# Altium PCB Bluetooth_NRF.PcbDoc
Units mm, origin at the board's own origin, x right, y up, seen from the top; angles counter-clockwise.
Board outline 55.88 x 83.72 mm, 2 copper layers (Component Side, Bottom Layer), stack 0.325 mm thick; 63 components, 139 nets, 448 pads, 16 vias.
Unrouted connection lines stored in the file: 111.
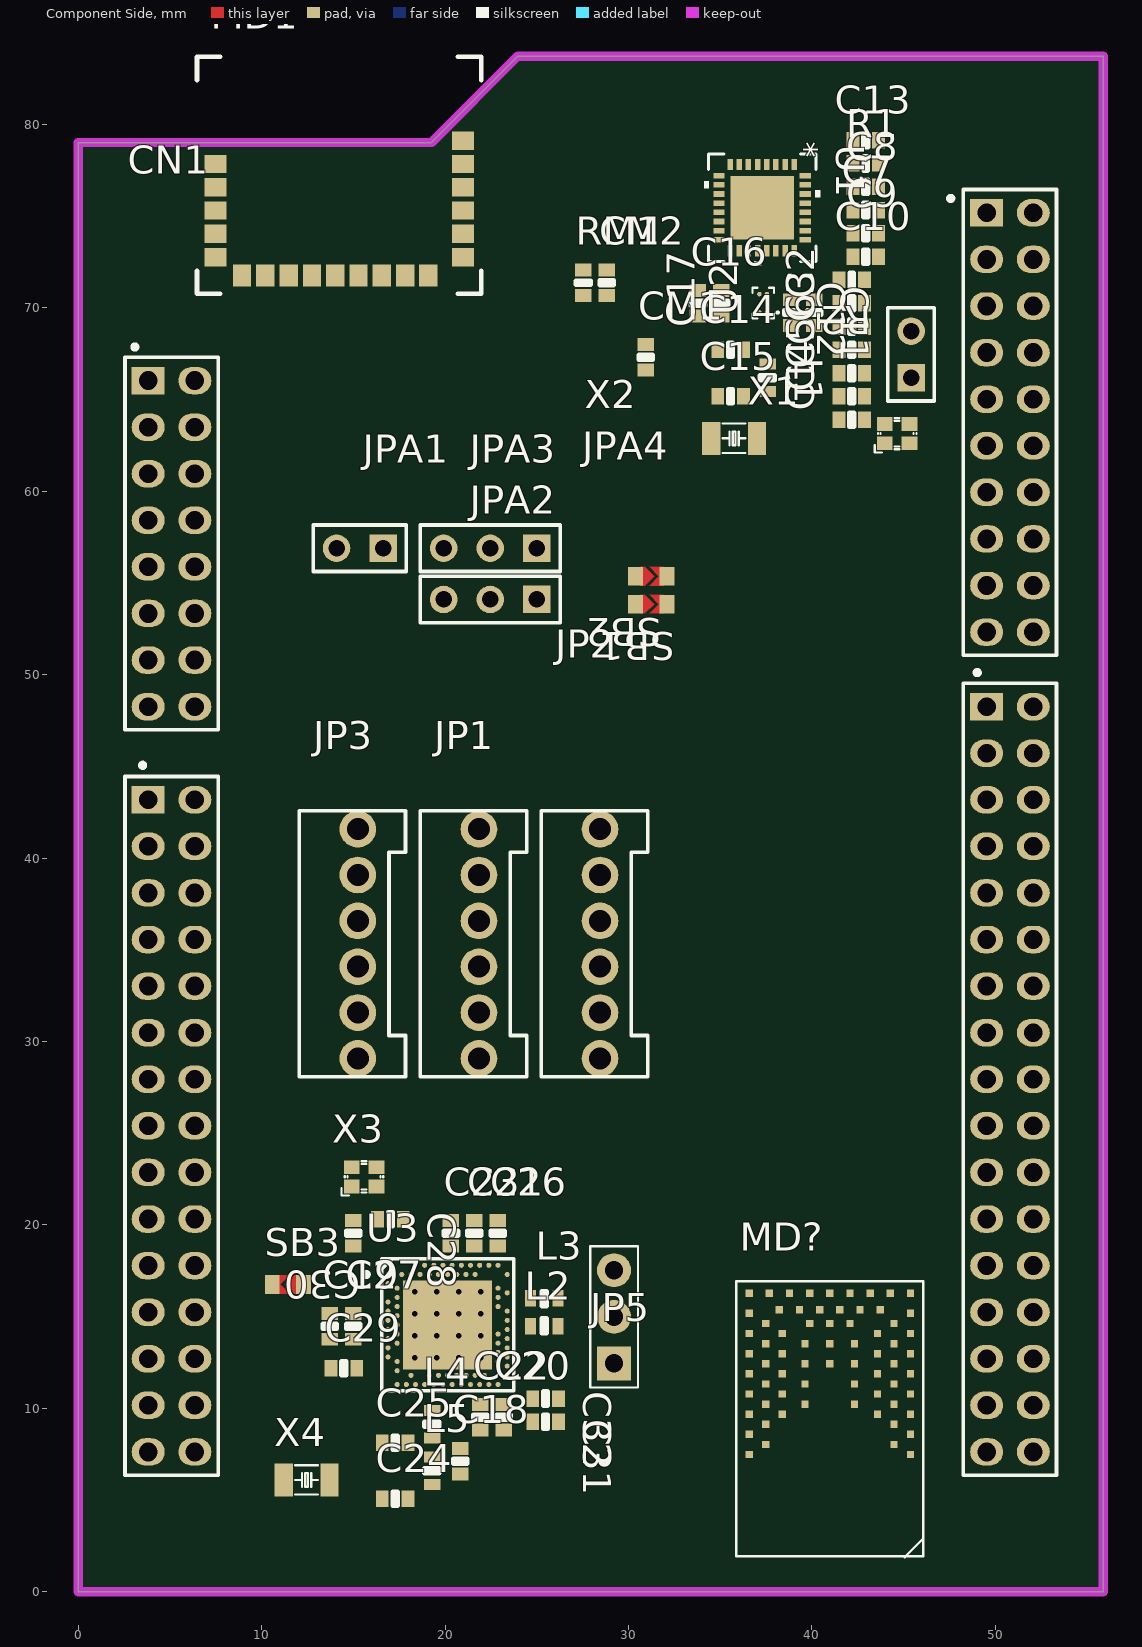
[diagram p0: Component Side view]
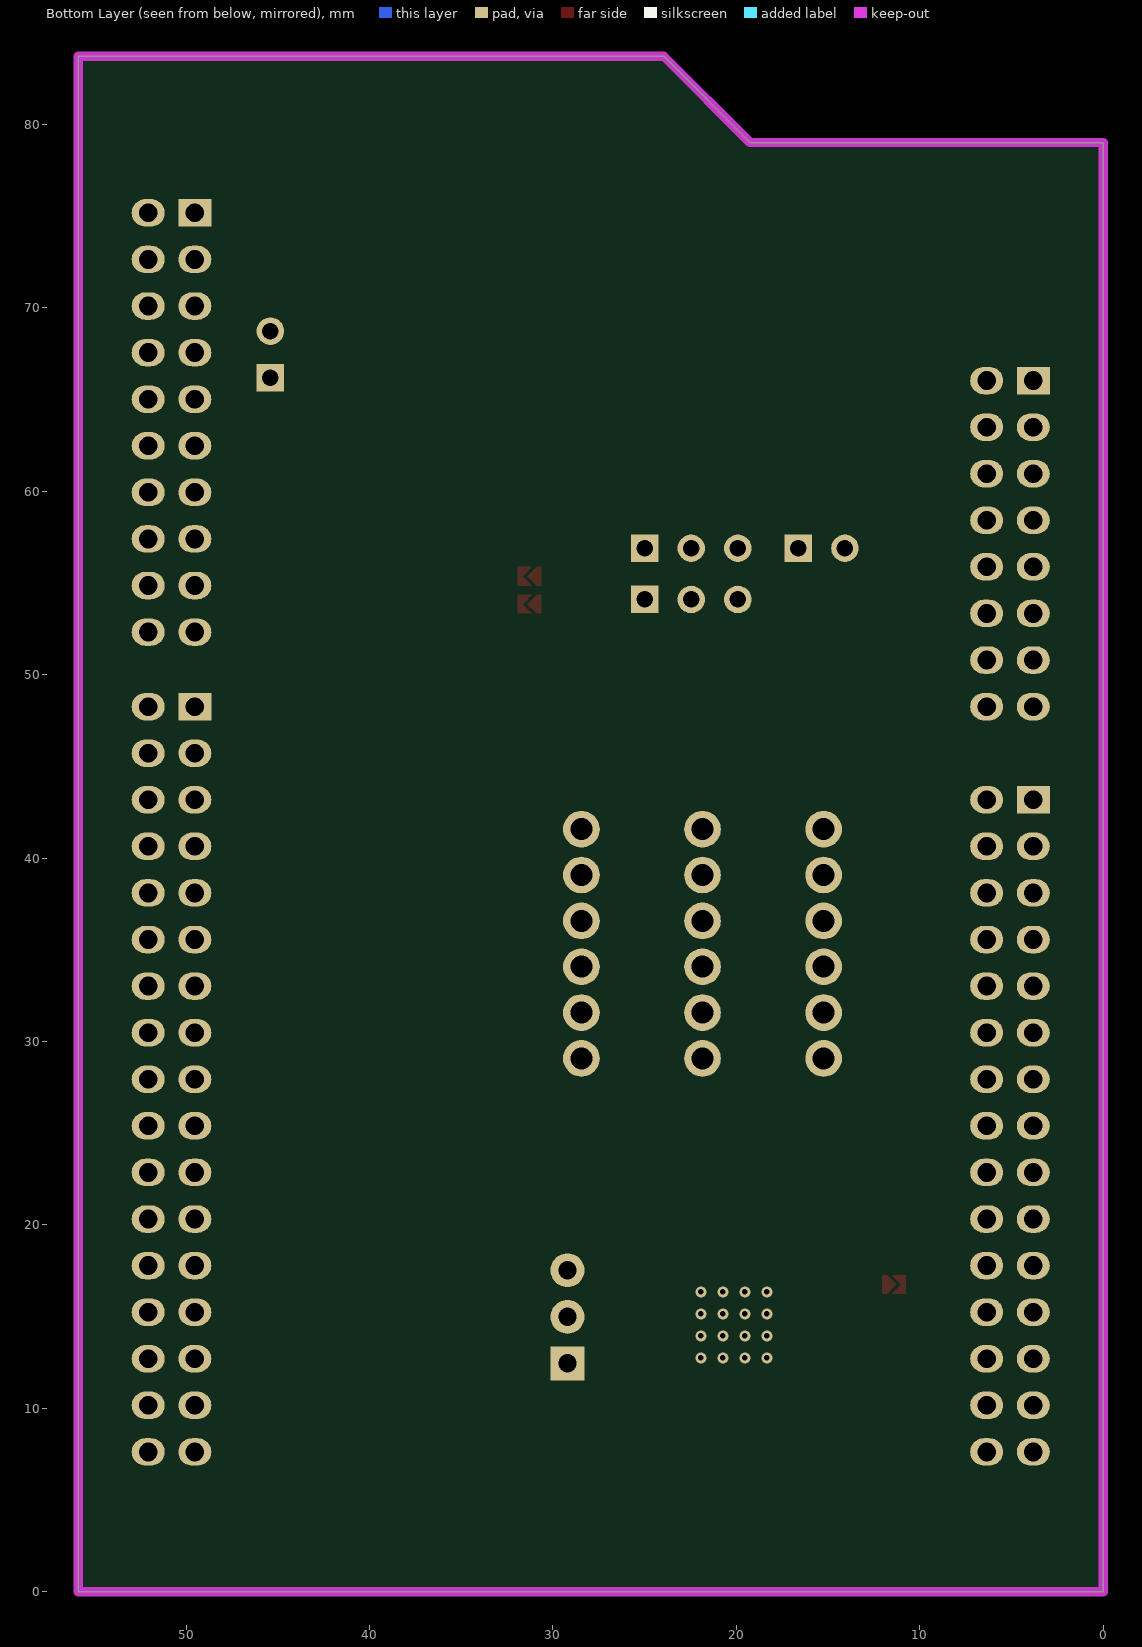
[diagram p1: Bottom Layer view, seen from below]

## Layer stack, top to bottom
Top Solder: solder mask 0.0102, Solder Resist, Dk 3.5
Component Side: signal copper 0.0356
Dielectric 1: core 0.254, FR-4, Dk 4.2
Bottom Layer: signal copper 0.0356
Solder Side: solder mask 0.0102, Solder Resist, Dk 3.5

## Board outline
0,0 55.88,0 55.88,83.718 23.952,83.718 19.253,79.019 0,79.019

## Design rules (kind name [scope] priority, off if disabled: settings)
Clearance [All] p1: gap=0.152 ignorepadtopadclearanceinfootprint=FALSE except(0: Arc-Hole Track-Hole SMDPad-Hole THPad-Hole Via-Hole Fill-Hole Poly-Hole Region-Hole Text-Hole)
ComponentClearance [Not IsNetTieComponent vs Not IsNetTieComponent] p1 off: gap=0.254 collisioncheckmode=3 verticalgap=0.254 showdistances=FALSE
Height [All] p1 off: minheight=0 maxheight=25.4 prefheight=12.7
HoleSize [All] p1: absolutevalues=TRUE maxlimit=12.7 minlimit=0.025 maxpercent=80.000 minpercent=20.000
MinimumSolderMaskSliver [All] p1: minsoldermaskwidth=0.076
PlaneClearance [All] p1: clearance=0.203
PlaneConnect [All] p1: planeconnectstyle=Direct reliefexpansion=0.508 reliefentries=4 reliefconductorwidth=0.254 reliefairgap=0.254
PolygonConnect PolygonConnectLED [HasFootprint('XZMDKCBDDG45S-9')] p1: connectstyle=Direct reliefconductorwidth=0.254 reliefentries=4 polygonreliefangle="90 Angle" airgapwidth=0.254
PolygonConnect PolygonConnectPower [IsNamedPolygon('Power')] p2: connectstyle=Direct reliefconductorwidth=0.254 reliefentries=4 polygonreliefangle="90 Angle" airgapwidth=0.254
PolygonConnect PolygonConnectVDD [All vs InNet('VDD')] p3: connectstyle=Direct reliefconductorwidth=0.254 reliefentries=4 polygonreliefangle="90 Angle" airgapwidth=0.254
PolygonConnect PolygonConnectVia [All vs IsVia] p4: connectstyle=Direct reliefconductorwidth=0.254 reliefentries=4 polygonreliefangle="90 Angle" airgapwidth=0.254
PolygonConnect [All] p5: connectstyle=Relief reliefconductorwidth=0.508 reliefentries=4 polygonreliefangle="90 Angle" airgapwidth=0.254
RoomDefinition U_BM833 [InComponentClass('U_BM833')] p1: confinementstyle=ConfineIn formatcopy=TRUE lockcomponents=FALSE outline 57.023,1.397 71.857,1.397 71.857,19.736 57.023,19.736
RoomDefinition U_NRF52833 [InComponentClass('U_NRF52833')] p2: confinementstyle=ConfineIn formatcopy=TRUE lockcomponents=FALSE outline 9.931,27.674 9.931,3.302 34.29,3.302 34.29,27.674
RoomDefinition U_BLUENRG-M2SP [InComponentClass('U_BLUENRG-M2SP')] p3: confinementstyle=ConfineIn formatcopy=TRUE lockcomponents=FALSE outline 4.724,45.466 33.89,45.466 33.89,99.822 4.724,99.822
RoomDefinition U_BLUENRG-232 [InComponentClass('U_BLUENRG-232')] p4: confinementstyle=ConfineIn formatcopy=TRUE lockcomponents=FALSE outline 31.807,82.194 31.807,60.604 46.793,60.604 46.793,82.194
RoomDefinition Bluetooth [InComponentClass('Bluetooth')] p5 off: confinementstyle=ConfineIn formatcopy=TRUE lockcomponents=FALSE outline 60.96,1.975 80.01,1.975 80.01,18.542 60.96,18.542
RoutingVias [All] p1: holewidth=0.254 width=0.508 viastyle="Through Hole" minholewidth=0.254 minwidth=0.508 maxholewidth=0.711 maxwidth=1.27
SilkToSilkClearance [All] p1: silktosilkclearance=0
SolderMaskExpansion SolderMaskExpansionVia [IsVia] p1: expansion=0.025 istentingtop=FALSE soldermaskfromhole=TRUE
SolderMaskExpansion [All] p2: expansion=0.076 istentingtop=FALSE
Width [All] p1: maxlimit=12.7 minlimit=0.102 preferedwidth=0.152 minimp=50.000000 maximp=50.000000 favimp=50.000000
23 further rules are at their usual default settings.

## Classes and differential pairs
net class P1.[0..9]: P1.0 P1.1 P1.2 P1.3 P1.4 P1.5 P1.6 P1.7 P1.8 P1.9
net class P0.[0..31]: P0.0 P0.1 P0.2 P0.3 P0.4 P0.5 P0.6 P0.7 P0.8 P0.9 P0.10 P0.11 P0.12 P0.13 P0.14 P0.15 P0.16 P0.17 P0.18 P0.19 P0.20 P0.21 P0.22 P0.23 P0.24 P0.25 P0.26 P0.27 P0.28 P0.29 P0.30 P0.31
component class U_BM833: MD?
net class SP[0..16]: SP0 SP1 SP2 SP3 SP4 SP5 SP6 SP7 SP8 SP9 SP10 SP11 SP12 SP13 SP14 SP15 SP16
net class NRF[2..21]: NRF2 NRF3 NRF4 NRF5 NRF6 NRF7 NRF8 NRF9 NRF10 NRF13 NRF14 NRF15 NRF16 NRF17 NRF18 NRF19 NRF20 NRF21
net class BNG[0..15]: BNG0 BNG1 BNG2 BNG3 BNG4 BNG5 BNG6 BNG7 BNG8 BNG9 BNG10 BNG11 BNG12 BNG13 BNG14 BNG15
component class U_NRF52833: C18 C18_U_NRF52833 C19 C19_U_NRF52833 C20 C20_U_NRF52833 C21 C21_U_NRF52833 C22 C22_U_NRF52833 C23 C23_U_NRF52833 C24 C24_U_NRF52833 C25 C25_U_NRF52833 C26 C26_U_NRF52833 C27 C27_U_NRF52833 C28 C28_U_NRF52833 C29 C29_U_NRF52833 C30 C30_U_NRF52833 C31 C31_U_NRF52833 C32 C32_U_NRF52833 JP5 JP5_U_NRF52833 L2 L2_U_NRF52833 L3 L3_U_NRF52833 L4 L4_U_NRF52833 L5 L5_U_NRF52833 SB3 SB3_U_NRF52833 U3 U3_U_NRF52833 X3 X3_U_NRF52833 X4 X4_U_NRF52833
component class U_BLUENRG-M2SP: CM1 CM2 JPA1 JPA2 JPA3 MD1 RM1 SB1 SB2
component class U_BLUENRG-232: C1 C2 C3 C4 C5 C6 C7 C8 C9 C10 C11 C12 C13 C14 C15 C16 C17 JPA4 L1 R1 R2 U1 U2 X1 X2
component class Bluetooth: CN1 JP1 JP2 JP3

## Components (designator, comment, footprint, x,y, rotation, side; value= is the part's Value field where it differs from the comment)
C1 "1uF 6.3V 0603" C0603[1608X92] 42.17,63.906 r180 top value=1uF
C2 "0.1uF 6.3V 0603" C0603[1608X92] 42.17,70.256 r180 top value=0.1uF
C3 "1uF 6.3V 0603" C0603[1608X92] 42.17,68.986 r180 top value=1uF
C4 "0.1uF 6.3V 0603" C0603[1608X92] 42.17,65.176 r180 top value=0.1uF
C5 "1uF 6.3V 0603" C0603[1608X92] 42.17,66.446 r180 top value=1uF
C6 "0.1uF 6.3V 0603" C0603[1608X92] 42.17,67.716 r180 top value=0.1uF
C7 "0.12uF 10V 0603" C0603[1608X92] 42.932,75.336 r0 top value=0.12uF
C8 "100pF 10V 0603" C0603[1608X92] 42.932,76.606 r0 top value=100pF
C9 "1uF 6.3V 0603" C0603[1608X92] 42.932,74.066 r0 top value=1uF
C10 "0.1uF 6.3V 0603" C0603[1608X92] 42.932,72.796 r0 top value=0.1uF
C11 "18pF 50V 0603" C0603[1608X92] 40.138,69.748 r270 top value=18pF
C12 "18pF 50V 0603" C0603[1608X92] 38.868,69.748 r270 top value=18pF
C13 "0.1uF 16V 0603" C0603[1608X92] 42.932,79.146 r0 top value=0.1uF
C14 "CAPACITOR 0603" C0603[1608X92] 35.566,67.716 r0 top
C15 "CAPACITOR 0603" C0603[1608X92] 35.566,65.176 r0 top
C16 "15pF 50V 0603" C0603[1608X92] 33.788,70.256 r90 top value=15pF
C17 "15pF 50V 0603" C0603[1608X92] 35.058,70.256 r90 top value=15pF
C18 "1uF 6.3V 0603" C0603[1608X92] 20.828,7.112 r270 top value=1uF
C19 "1uF 6.3V 0603" C0603[1608X92] 13.716,14.466 r90 top value=1uF
C20 "15pF 50V 0603" C0603[1608X92] 23.19,9.513 r90 top value=15pF
C21 "18pF 50V 0603" C0603[1608X92] 21.59,19.546 r90 top value=18pF
C22 "15pF 50V 0603" C0603[1608X92] 21.92,9.513 r90 top value=15pF
C23 "18pF 50V 0603" C0603[1608X92] 20.32,19.546 r90 top value=18pF
C24 "CAPACITOR 0603" C0603[1608X92] 17.272,5.068 r0 top
C25 "CAPACITOR 0603" C0603[1608X92] 17.272,8.116 r0 top
C26 "0.1uF 16V 0603" C0603[1608X92] 22.86,19.546 r90 top value=0.1uF
C27 "4.7uF 16V 0603" C0603[1608X92] 14.986,14.466 r90 top value=4.7uF
C28 "4.7uF 16V 0603" C0603[1608X92] 17.018,20.308 r0 top value=4.7uF
C29 "CAPACITOR 0603" C0603[1608X92] 14.478,12.18 r0 top
C30 "4.7uF 16V 0603" C0603[1608X92] 14.986,19.546 r270 top value=4.7uF
C31 "0.1uF 16V 0603" C0603[1608X92] 25.476,9.259 r0 top value=0.1uF
C32 "0.1uF 16V 0603" C0603[1608X92] 25.476,10.529 r0 top value=0.1uF
CM1 "10uF 6.3V 0603" C0603[1608X92] 30.937,67.31 r270 top value=10uF
CM2 "0.1uF 16V 0603" C0603[1608X92] 28.81,71.374 r270 top value=0.1uF
CN1 "ST_Zio connector" ST_Zio 3.81,7.62 r0 top locked
JP1 "SWD" MOLEX_5045_6 21.844,35.326 r270 top
JP2 "SWD" MOLEX_5045_6 28.448,35.326 r270 top
JP3 "SWD" MOLEX_5045_6 15.24,35.326 r270 top
JP5 "Jumper_Header 3x1 Fitted 1-2" HDR1X3#1 29.21,12.446 r90 top value="Shunt Fitted 1-2"
JPA1 "Header 2" HDR1X2 16.618,56.896 r180 top
JPA2 "Header 3" HDR1X3#2 25,54.102 r180 top
JPA3 "Header 3" HDR1X3#2 25,56.896 r180 top
JPA4 "Header 2" HDR1X2 45.41,66.192 r90 top
L1 "INDUCTOR 0603" IND0603 37.598,66.192 r270 top
L2 "INDUCTOR 0603" IND0603 25.4,14.478 r180 top
L3 "INDUCTOR 0603" IND0603 25.4,16.002 r0 top
L4 "INDUCTOR 0603" IND0603 19.304,9.132 r270 top
L5 "INDUCTOR 0603" IND0603 19.304,6.592 r270 top
MD1 "BLUENRG-M2SP" BLUENRG-M2SP 14.218,76.581 r0 top
MD? "BM833" BM833 40.975,9.826 r180 top
R1 "10K 1% 0603" R0603[1608] 42.932,77.876 r0 top value=10K
R2 "10K 1% 0603" R0603[1608] 42.17,71.526 r180 top value=10K
RM1 "10K 1% 0603" R0603[1608] 27.54,71.374 r270 top value=10K
SB1 "Closed" SB_0603 31.242,53.848 r180 top
SB2 "Open" SB_0603 31.242,55.372 r180 top
SB3 "Closed" SB_0603 11.43,16.752 r0 top
U1 "BLUENRG-232" QFPN-32-5x5mm 37.287,75.463 r270 top
U2 "BALF-NRG-02D3" "CSPG-4 (0.4mm)" 37.344,70.256 r90 top
U3 "NRF52833" AQFN-73 20.135,14.546 r0 top
X1 "NX3215SA 32.768KHz" 2-SMD 35.758,62.89 r0 top value=32.768KHz
X2 "NX2016SA 32MHz" 4-SMD 44.648,63.144 r0 top value=32MHz
X3 "NX2016SA 32MHz" 4-SMD 15.581,22.623 r0 top value=32MHz
X4 "NX3215SA 32.768KHz" 2-SMD 12.446,6.096 r0 top value=32.768KHz

## Footprints (in the part's own frame and the unit in brackets; to place one, negate y for a bottom-side part, rotate by r counter-clockwise, add the part's x,y. Pads: shape width x height; smd on the part's side, far side on the other; paste and mask are expansions set on the pad)
2-SMD [mm]
  rect 1x1.8 smd mask+0.05: 1(1.25,0) 2(-1.25,0)
  silkscreen extent -0.63,-0.8 0.63,0.8, body extent -1.65,-0.8 1.65,0.8, height 0.9
4-SMD [mm]
  rect 0.85x0.75 smd mask+0.05: 1(-0.675,-0.525) 2(0.675,-0.525) 3(0.675,0.525) 4(-0.675,0.525)
  silkscreen extent -1.22,-1.02 1.05,0.85, body extent -1.05,-0.85 1.05,0.85, height 0.7
AQFN-73 [mm]
  rect 4.85x4.85 smd paste-5 mask+0.05: 74(0,0)
  round 0.275 smd paste+0.012 mask+0.05: A8(-1.25,3.25) A10(-0.75,3.25) A12(-0.25,3.25) A14(0.25,3.25) A16(0.75,3.25) A18(1.25,3.25) A20(1.75,3.25) A22(2.25,3.25) A23(2.75,3.25) AA24(3.25,-2.25) AB2(-2.75,-2.5) AC5(-2,-2.75) AC9(-1,-2.75) AC11(-0.5,-2.75) AC13(0,-2.75) AC15(0.5,-2.75) AC17(1,-2.75) AC19(1.5,-2.75) AC21(2,-2.75) AC24(3.25,-2.75) AD2(-2.75,-3.25) AD4(-2.25,-3.25) AD6(-1.75,-3.25) AD8(-1.25,-3.25) AD10(-0.75,-3.25) AD12(-0.25,-3.25) AD14(0.25,-3.25) AD16(0.75,-3.25) AD18(1.25,-3.25) AD20(1.75,-3.25) AD22(2.25,-3.25) AD23(2.75,-3.25) B1(-3.25,2.75) B3(-2.5,2.75) B5(-2,2.75) B7(-1.5,2.75) B9(-1,2.75) B11(-0.5,2.75) B13(0,2.75) B15(0.5,2.75) B17(1,2.75) B19(1.5,2.75) B24(3.25,2.75) C1(-3.25,2.25) D2(-2.75,2) D23(2.75,2) E24(3.25,1.75) F2(-2.75,1.5) F23(2.75,1.5) G1(-3.25,1.25) H2(-2.75,1) H23(2.75,1) J1(-3.25,0.75) J24(3.25,0.75) K2(-2.75,0.5) L1(-3.25,0.25) L24(3.25,0.25) M2(-2.75,0) N1(-3.25,-0.25) N24(3.25,-0.25) P2(-2.75,-0.5) P23(2.75,-0.5) R1(-3.25,-0.75) R24(3.25,-0.75) T2(-2.75,-1) T23(2.75,-1) U1(-3.25,-1.25) U24(3.25,-1.25) V23(2.75,-1.5) W1(-3.25,-1.75) W24(3.25,-1.75) Y2(-2.75,-2) Y23(2.75,-2)
  rrect50% 0.94x0.94 on Top Paste: ""(-1.71,-1.71) ""(-1.71,-0.57) ""(-1.71,0.57) ""(-1.71,1.71) ""(-0.57,-1.71) ""(-0.57,-0.57) ""(-0.57,0.57) ""(-0.57,1.71) ""(0.57,-1.71) ""(0.57,-0.57) ""(0.57,0.57) ""(0.57,1.71) ""(1.71,-1.71) ""(1.71,-0.57) ""(1.71,0.57) ""(1.71,1.71)
  silkscreen extent -4.56,-3.6 3.6,3.6, body extent -3.55,-3.55 3.55,3.55, height 0.85
BLUENRG-M2SP [mm]
  rect 1.2x1 smd: 1(-6.75,1.27) 2(-6.75,0) 3(-6.75,-1.27) 4(-6.75,-2.54) 5(-6.75,-3.81) 15(6.75,-3.81) 16(6.75,-2.54) 17(6.75,-1.27) 18(6.75,0) 19(6.75,1.27) 20(6.75,2.54)
  rect 1x1.2 smd: 6(-5.29,-4.81) 7(-4.02,-4.81) 8(-2.75,-4.81) 9(-1.48,-4.81) 10(-0.21,-4.81) 11(1.06,-4.81) 12(2.33,-4.81) 13(3.6,-4.81) 14(4.87,-4.81)
  Component Side region: -0.254,1.448
  silkscreen extent -7.75,-5.82 7.75,7.11
BM833 [mm]
  rect 0.4x0.4 smd: 1(-4.4,2.35) 2(-3.5,1.8) 3(-4.4,1.25) 4(-3.5,0.7) 5(-4.4,0.15) 6(-3.5,-0.4) 7(-4.4,-0.95) 8(-3.5,-1.5) 9(-4.4,-2.05) 10(-3.5,-2.6) 11(-4.4,-3.15) 12(-3.5,-3.7) 13(-4.4,-4.25) 14(-3.5,-4.8) 15(-4.4,-5.35) 16(-4.4,-6.45) 17(-3.3,-6.45) 18(-2.75,-5.55) 19(-2.2,-6.45) 20(-1.65,-5.55) 21(-1.1,-6.45) 22(-0.55,-5.55) 23(0,-6.45) 24(0.55,-5.55) 25(1.1,-6.45) 26(1.65,-5.55) 27(2.2,-6.45) 28(2.75,-5.55) 29(3.3,-6.45) 30(4.4,-6.45) 31(4.4,-5.35) 32(3.5,-4.8) 33(4.4,-4.25) 34(3.5,-3.7) 35(4.4,-3.15) 36(3.5,-2.6) 37(4.4,-2.05) 38(3.5,-1.5) 39(4.4,-0.95) 40(3.5,-0.4) 41(4.4,0.15) 42(3.5,0.7) 43(4.4,1.25) 44(3.5,1.8) 45(4.4,2.35) 46(1.35,-0.4) 47(-1.35,-0.4) 48(-2.6,0.15) 49(-2.6,-0.95) 50(-1.35,-1.5) 51(-2.6,-2.05) 52(-1.35,-2.6) 53(-2.6,-3.15) 54(-1.35,-3.7) 55(-2.6,-4.25) 56(-1.1,-4.8) 57(0,-4.8) 58(1.1,-4.8) 59(2.6,-4.25) 60(1.35,-3.7) 61(2.6,-3.15) 62(1.35,-2.6) 63(2.6,-2.05) 64(1.35,-1.5) 65(2.6,-0.95) 66(2.6,0.15) 67(0,-3.7) 68(0,-2.6)
  silkscreen extent -5.1,-7.1 5.1,7.94
C0603[1608X92] [mm] "Chip Capacitor, Body 1.6x0.8mm"
  rect 0.7x0.9 smd: 1(-0.7,0) 2(0.7,0)
  silkscreen extent -0.13,-0.38 0.13,0.38, body extent -0.8,-0.4 0.8,0.4, height 0.93
"CSPG-4 (0.4mm)" [mm]
  round 0.25 smd mask+0.05: A1(-0.5,-0.205) A2(-0.5,0.205) B1(0.5,-0.205) B2(0.5,0.205)
  silkscreen extent -0.84,-0.81 0.83,0.59, body extent -0.7,-0.45 0.7,0.45, height 0.25
HDR1X2 [mm] "Connector; Header; 2 Position"
  rect 1.5x1.5 hole 0.9: 1(0,0)
  round 1.5 hole 0.9: 2(2.54,0)
  silkscreen extent -1.27,-1.27 3.81,1.27
HDR1X3#1 [mm]
  rect 1.85x1.85 / inner round 1.85 / far side rect 1.85x1.85 hole 1 mask+0.05: 1(0,0)
  round 1.85 hole 1 mask+0.05: 2(2.54,0) 3(5.08,0)
  silkscreen extent -1.31,-1.3 6.39,1.3, body extent -1.37,-1.37 6.45,1.37, height 8.38
HDR1X3#2 [mm] "Connector; Header; 3 Position"
  rect 1.5x1.5 hole 0.9: 1(0,0)
  round 1.5 hole 0.9: 2(2.54,0) 3(5.08,0)
  silkscreen extent -1.27,-1.27 6.35,1.27
IND0603 [mm] "Chip Inductor, Body 1.55x0.85mm"
  rect 0.6x0.9 smd: 1(-0.75,0) 2(0.75,0)
  silkscreen extent -0.13,-0.43 0.13,0.38, body extent -0.85,-0.48 0.75,0.48, height 0.81
MOLEX_5045_6 [mm]
  round 2 hole 1.2: 1(-6.25,0) 2(-3.75,0) 3(-1.25,0) 4(1.25,0) 5(3.75,0) 6(6.25,0)
  silkscreen extent -7.25,-3.2 7.25,2.6, body extent -7.25,-3.15 7.25,2.65, height 11.7
QFPN-32-5x5mm [mil]
  rect 24x12 smd paste-6: 1(-92.52,68.91) 2(-92.52,49.23) 3(-92.52,29.53) 4(-92.52,9.85) 5(-92.52,-9.85) 6(-92.52,-29.53) 7(-92.52,-49.23) 8(-92.52,-68.91) 17(92.52,-68.91) 18(92.52,-49.23) 19(92.52,-29.53) 20(92.52,-9.85) 21(92.52,9.85) 22(92.52,29.53) 23(92.52,49.23) 24(92.52,68.91)
  rect 12x24 smd paste-6: 9(-68.92,-92.52) 10(-49.23,-92.52) 11(-29.53,-92.52) 12(-9.84,-92.52) 13(9.84,-92.52) 14(29.53,-92.52) 15(49.23,-92.52) 16(68.92,-92.52) 25(68.92,92.52) 26(49.23,92.52) 27(29.53,92.52) 28(9.84,92.52) 29(-9.84,92.52) 30(-29.53,92.52) 31(-49.23,92.52) 32(-68.92,92.52)
  rect 136x136 smd paste-68: 33(0,0)
  silkscreen extent -116,-125 125,125, body extent -103,-103 103,103, height 25
R0603[1608] [mm] "Chip Resistor, Body 1.55x0.85mm"
  rect 0.7x0.9 smd: 1(-0.7,0) 2(0.7,0)
  silkscreen extent -0.1,-0.4 0.1,0.4, body extent -0.77,-0.42 0.78,0.43, height 0.45
SB_0603 [mil] "Jumper"
  rect 32x40 smd: 1(33.75,0) 2(-33.75,0)
  Component Side region: -26.25,0 -16.25,0 3.75,-20 -26.25,-20
  Component Side region: -26.25,0 -16.25,0 3.75,20 -26.25,20
  Component Side region: 23.75,20 13.75,20 -6.25,0 13.75,-20 23.75,-20
ST_Zio [mm]
  rect 1.8x1.5 hole 1.02: 1(0,58.42) 17(0,35.56) 47(45.72,67.564) 67(45.72,40.64)
  oval 1.8x1.5 hole 1.02: 2(2.54,58.42) 3(0,55.88) 4(2.54,55.88) 5(0,53.34) 6(2.54,53.34) 7(0,50.8) 8(2.54,50.8) 9(0,48.26) 10(2.54,48.26) 11(0,45.72) 12(2.54,45.72) 13(0,43.18) 14(2.54,43.18) 15(0,40.64) 16(2.54,40.64) 18(2.54,35.56) 19(0,33.02) 20(2.54,33.02) 21(0,30.48) 22(2.54,30.48) 23(0,27.94) 24(2.54,27.94) 25(0,25.4) 26(2.54,25.4) 27(0,22.86) 28(2.54,22.86) 29(0,20.32) 30(2.54,20.32) 31(0,17.78) 32(2.54,17.78) 33(0,15.24) 34(2.54,15.24) 35(0,12.7) 36(2.54,12.7) 37(0,10.16) 38(2.54,10.16) 39(0,7.62) 40(2.54,7.62) 41(0,5.08) 42(2.54,5.08) 43(0,2.54) 44(2.54,2.54) 45(0,0) 46(2.54,0) 48(48.26,67.564) 49(45.72,65.024) 50(48.26,65.024) 51(45.72,62.484) 52(48.26,62.484) 53(45.72,59.944) 54(48.26,59.944) 55(45.72,57.404) 56(48.26,57.404) 57(45.72,54.864) 58(48.26,54.864) 59(45.72,52.324) 60(48.26,52.324) 61(45.72,49.784) 62(48.26,49.784) 63(45.72,47.244) 64(48.26,47.244) 65(45.72,44.704) 66(48.26,44.704) 68(48.26,40.64) 69(45.72,38.1) 70(48.26,38.1) 71(45.72,35.56) 72(48.26,35.56) 73(45.72,33.02) 74(48.26,33.02) 75(45.72,30.48) 76(48.26,30.48) 77(45.72,27.94) 78(48.26,27.94) 79(45.72,25.4) 80(48.26,25.4) 81(45.72,22.86) 82(48.26,22.86) 83(45.72,20.32) 84(48.26,20.32) 85(45.72,17.78) 86(48.26,17.78) 87(45.72,15.24) 88(48.26,15.24) 89(45.72,12.7) 90(48.26,12.7) 91(45.72,10.16) 92(48.26,10.16) 93(45.72,7.62) 94(48.26,7.62) 95(45.72,5.08) 96(48.26,5.08) 97(45.72,2.54) 98(48.26,2.54) 99(45.72,0) 100(48.26,0)
  silkscreen extent -1.27,-1.27 49.53,68.83, body extent -1.27,-1.27 49.53,68.83, height 8.64

## Part data
C1 C3 C5 C9 C18 C19: library part CAP_1uF_6.3V_0603_10%, "1uF 6.3V 10% 0603 (1608 Metric)", Manufacturer=Murata, PartNumber=GRM188R60J105KA01D, TemperatureCoefficient=X5R, Tolerance=10%, Voltage=6.3V, Mounting Technology="Surface Mount", PackageDescription="0603 (1608 Metric)", PackageReference=0603
C2 C4 C6 C10: library part CAP_0.1uF_6.3V_0603_10%, "0.1uF 6.3V 10% 0603 (1608 Metric)", Manufacturer=Murata, PartNumber=GRM188R70J104KA01D, Tolerance=10%, Voltage=6.3V, Mounting Technology="Surface Mount", PackageDescription="0603 (1608 Metric)", PackageReference=0603
C7: library part CAP_0.12uF_10V_0603_10%, "0.12uF 10V 10% 0603 (1608 Metric)", Manufacturer=Murata, PartNumber=GRM188R71A124KA01D, TemperatureCoefficient=X7R, Tolerance=10%, Voltage=10V, Mounting Technology="Surface Mount", PackageDescription="0603 (1608 Metric)", PackageReference=0603
C8: library part CAP_100pF_10V_0603_10%, "100pF 10V 10% 0603 (1608 Metric)", Manufacturer=Wurth, PartNumber=885012206003, TemperatureCoefficient=X7R, Tolerance=10%, Voltage=10V, Mounting Technology="Surface Mount", PackageDescription="0603 (1608 Metric)", PackageReference=0603
C11 C12 C21 C23: library part CAP_18pF_50V_0603_1%, "18pF 50V 1% 0603 (1608 Metric)", Manufacturer="AVX Corporation", PartNumber=06035A180FAT2A, TemperatureCoefficient=C0G, Tolerance=1%, Voltage=50V, Mounting Technology="Surface Mount", PackageDescription="0603 (1608 Metric)", PackageReference=0603
C13 C26 C31 C32 CM2: library part CAP_0.1uF_16V_0603_10%, "0.1uF 16V 10% 0603 (1608 Metric)", Manufacturer=Murata, PartNumber=GCM188R71C104KA37D, TemperatureCoefficient=X7R, Tolerance=10%, Voltage=16V, Mounting Technology="Surface Mount", PackageDescription="0603 (1608 Metric)", PackageReference=0603
C14 C15 C24 C25 C29: library part "CAP 0603", "Empty CAPACITOR 0603 (1608 Metric)", Mounting Technology="Surface Mount", PackageDescription="0603 (1608 Metric)", PackageReference=0603
C16 C17 C20 C22: library part CAP_15pF_50V_0603_1%, "15pF 50V 1% 0603 (1608 Metric)", Manufacturer="AVX Corporation", PartNumber=06035A150FAT2A, TemperatureCoefficient=C0G, Tolerance=1%, Voltage=50V, Mounting Technology="Surface Mount", PackageDescription="0603 (1608 Metric)", PackageReference=0603
C27 C28 C30: library part CAP_4.7uF_16V_0603_10%, "4.7uF 16V 10% 0603 (1608 Metric)", Manufacturer=Murata, PartNumber=GRM188R61A475KE15D, TemperatureCoefficient=X5R, Tolerance=10%, Voltage=16V, Mounting Technology="Surface Mount", PackageDescription="0603 (1608 Metric)", PackageReference=0603
CM1: library part CAP_10uF_6.3V_0603_10%, "10uF 6.3V 10% 0603 (1608 Metric)", Manufacturer=Murata, PartNumber=GRM188R60J106KE47D, TemperatureCoefficient=X5R, Tolerance=10%, Voltage=6.3V, Mounting Technology="Surface Mount", PackageDescription="0603 (1608 Metric)", PackageReference=0603
JP1 JP2 JP3: library part MOLEX_5045_6, Manufacturer="JST Sales America Inc.", PartNumber=B6B-PH-K-S(LF)(SN), Mounting Technology="Through Hole", PackageReference=JST-PH
JP5: "Header, 3x1, 2,54mm, VR, TH, Height 5.84mm/2.54mm - Shunt Fitted 1-2 by default", Manufacturer=SAMTEC, Manufacturer_Part_Number=TSW-103-07-F-S, ComponentLink1Description=Datasheet, ComponentLink1URL=http://tunmcdsvn.tun.st.com/Component_Datasheet_Library/Trunk/Connectors/Samtec_TSW-HTSW-series, ECCN_EU=n/a, ECCN_US=n/a, Internal_Part_Number=MCD-00684, Part_Type=Connector, Provided_By=SUBCO, Status=Released
JPA1 JPA4: "Header, 2-Pin", LatestRevisionDate=17-Jul-2002, LatestRevisionNote="Re-released for DXP Platform.", Publisher="Altium Limited"
JPA2 JPA3: "Header, 3-Pin", LatestRevisionDate=17-Jul-2002, LatestRevisionNote="Re-released for DXP Platform.", Publisher="Altium Limited"
L1 L2 L3 L4 L5: library part "IND 0603", "Empty INDUCTOR 0603", Mounting Technology="Surface Mount", PackageDescription="0603 (1608 metric)", PackageReference=0603
MD1 U1: Manufacturer=STMicroelectronics
  MD1: PartNumber=BLUENRG-M2SP
  U1: Mounting Technology="Surface Mount", PackageReference=QFN-32, Part Number=BLUENRG-232
MD?: "ultra low power Bluetooth Low Energy (BLE) modules using Nordic nRF52 SoC.  PCB trace Antenna", Manufacturer=Fanstel, PartNumber=BM833
R1 R2 RM1: library part RES_10K_0603_1%, "10K 0.25W 1% 0603 (1005 Metric)", Manufacturer="Vishay / Dale", PartNumber=CRCW060310K0FKEAHP, Power=0.25W, Tolerance=1%, ComponentLink1Description=Datasheet, ComponentLink1URL=http://www.vishay.com/docs/20065/rcse3.pdf, Mounting Technology="Surface Mount", PackageDescription="0603 (1608 Metric)", PackageReference=0603
SB1 SB3: library part "Circuit Breaker_close", "Circuit Breaker", Published=24-Mar-1999, Publisher="Altium Limited", Revision="July-2002: Re-released for DXP Platform."
SB2: library part "Circuit Breaker", "Circuit Breaker", Published=24-Mar-1999, Publisher="Altium Limited", Revision="July-2002: Re-released for DXP Platform."
U2: "50 ohm nominal input / conjugate match to BlueNRG tranceiver", Manufacturer=STMicroelectronics, Mounting Technology="Surface Mount", PackageReference=CSPG-4, PartNumber=BALF-NRG-02D3
U3: "Multi-protocol Bluetooth Low Energy, IEEE 802.15.4, ANT and 2.4GHz proprietary system-on-chip", Manufacturer="Nordic Semiconductor", PartNumber=nRF52833-QIAA, Mounting Technology="Surface Mount", PackageReference=AQFN-73
X1 X4: "Crystal 32.768kHz, 6pF, +-20ppm, 50Kohms max, SMD", Manufacturer=NDK, PartNumber=NX3215SA-32.768KHz-EXS00A-MU00525, Mounting Technology="Surface Mount", PackageReference=2-SMD, Type=Crystal_Osc
X2 X3: "Crystal 32MHz, 6pF, +-10ppm, 60ohms max, SMD", Manufacturer=NDK, PartNumber=NX2016SA-32MHZ-EXS00A-CS07977, Mounting Technology="Surface Mount", PackageReference=4-SMD, Type=Crystal_Osc

## Via types
v1: diameter 0.61, hole 0.305, Component Side to Bottom Layer, 16 vias

## Nets (pads, with @x,y where several pads share a name; then routed paths per layer and width w, separated by ;. In a path a pad name is that pad's centre, name@x,y a point inside that pad or via, vN(x,y) a via of type N, cw(c..) or ccw(c..) an arc to the next point about the centre after c; other vN are vias at no path point)
5V: CN1.9
AVDD: CN1.52 CN1.67
BNG0: CN1.56 CN1.84 U1.12
BNG1: CN1.86 U1.11
BNG2: CN1.58 CN1.90 U1.10
BNG3: CN1.60 CN1.92 U1.9
BNG4: CN1.94 U1.8
BNG5: CN1.96 U1.7
BNG6: CN1.98 U1.5
BNG7: CN1.100 U1.4
BNG8: CN1.99 U1.3
BNG9: CN1.97 JP2.2 U1.2
BNG10: CN1.95 JP2.4 U1.1
BNG11: CN1.91 U1.32
BNG12: CN1.89 U1.30
BNG13: CN1.87 U1.29
BNG14: CN1.85 U1.15
BNG15: CN1.81 U1.16
DEC: C18.2 JP5.2
GND: C1.1 C2.1 C3.1 C4.1 C5.1 C6.1 C7.2 C8.2 C9.2 C10.2 C11.2 C12.2 C13.2 C14.1 C15.1 C16.1 C17.1 C18.1 C19.1 C20.1 C21.2 C22.1 C23.2 C24.1 C25.1 C26.2 C27.1 C28.1 C29.1 C30.1 C31.2 C32.2 CM1.2 CM2.2 CN1.11 CN1.13 CN1.28 CN1.39 CN1.54 CN1.71 CN1.83 CN1.88 CN1.93 JP1.3 JP2.3 JP3.3 MD1.8 MD?.1 MD?.2 MD?.3 MD?.4 MD?.5 MD?.13 MD?.15 MD?.18 MD?.19 MD?.30 MD?.44 R1.2 U1.33 U2.A2 U3.74 U3.B7 X2.2 X2.4 X3.2 X3.4
  other v1: 18.335,12.746 19.535,12.746 20.735,12.746 21.935,12.746 18.335,13.946 19.535,13.946 20.735,13.946 21.935,13.946 18.335,15.146 19.535,15.146 20.735,15.146 21.935,15.146 18.335,16.346 19.535,16.346 20.735,16.346 21.935,16.346
I2C.SCL: CN1.48
I2C.SDA: CN1.50
IOREF: CN1.3
NetC7_1: C7.1 C8.1 U1.28
NetC9_1: C9.1 C10.1 U1.27
NetC11_1: C11.1 U1.23 X1.1
NetC12_1: C12.1 U1.22 X1.2
NetC14_2: C14.2 L1.1 U2.A1
NetC15_2: C15.2 L1.2
NetC16_2: C16.2 U1.17 X2.3
NetC17_2: C17.2 U1.18 X2.1
NetC20_2: C20.2 U3.A23 X3.1
NetC22_2: C22.2 U3.B24 X3.3
NetC24_2: C24.2 L4.1 U3.H23
NetC25_2: C25.2 L4.2 L5.1
NetCM2_1: CM2.1 JP1.5 RM1.1
NetJP2_5: JP2.5
NetJP3_2: JP3.2 U3.AA24
NetJP3_4: JP3.4 U3.AC24
NetJP5_1: JP5.1 L2.2
NetJP5_3: JP5.3 L3.1 U3.B3
NetL2_1: L2.1 L3.2
NetR1_1: R1.1 U1.31
NetSB3_1: SB3.1
NetU1_20: U1.20 U2.B2
NetU1_21: U1.21 U2.B1
NRF2: CN1.30
NRF3: CN1.32
NRF4: CN1.34
NRF5: CN1.36
NRF6: CN1.38
NRF7: CN1.40
NRF8: CN1.42
NRF9: CN1.44
NRF10: CN1.46
NRF13: CN1.45
NRF14: CN1.43
NRF15: CN1.41
NRF16: CN1.37
NRF17: CN1.35
NRF18: CN1.33
NRF19: CN1.31
NRF20: CN1.29
NRF21: CN1.26
NRST: CN1.5
P0.0: C21.1 U3.D2 X4.2
P0.1: C23.1 U3.F2 X4.1
P0.2: U3.A12
P0.3: U3.B13
P0.4: U3.J1
P0.5: U3.K2
P0.6: U3.L1
P0.7: U3.M2
P0.8: U3.N1
P0.9: U3.L24
P0.10: U3.J24
P0.11: U3.T2
P0.12: U3.U1
P0.13: U3.AD8
P0.14: U3.AC9
P0.15: U3.AD10
P0.16: U3.AC11
P0.17: U3.AD12
P0.18: SB3.2 U3.AC13
P0.19: U3.A14
P0.20: U3.AD16
P0.21: U3.AC17
P0.22: U3.AD18
P0.23: U3.B17
P0.24: U3.AD20
P0.25: U3.A20
P0.26: U3.G1
P0.27: U3.H2
P0.28: U3.B11
P0.29: U3.A10
P0.30: U3.B9
P0.31: U3.A8
P1.0: U3.AD22
P1.1: U3.Y23
P1.2: U3.W24
P1.3: U3.B15
P1.4: U3.U24
P1.5: U3.A16
P1.6: U3.R24
P1.7: U3.P23
P1.8: U3.P2
P1.9: U3.R1
SP0: CN1.2 MD1.15
SP1: CN1.4 MD1.18 SB2.1
SP2: CN1.6 MD1.16
SP3: CN1.8 MD1.17
SP4: CN1.10 MD1.3
SP5: CN1.12 MD1.4
SP6: CN1.14 MD1.9
SP7: CN1.16 MD1.7
SP8: CN1.49 MD1.10
SP9: CN1.51 JP1.2 MD1.12
SP10: CN1.53 JP1.4 MD1.13
SP11: CN1.55 MD1.11 SB1.1
SP12: CN1.57 MD1.20
SP13: CN1.59 MD1.14
SP14: CN1.61 MD1.6
SP15: CN1.63 MD1.2
SP16: CN1.65 MD1.1
SPI.CS1: CN1.62
SPI.CS2: CN1.64 SB1.2 SB2.2
SPI.CS3: CN1.66
UART.RX: JPA3.2
UART.TX: JPA2.2
UART_RX_A: JPA3.3
UART_RX_B: JPA3.1
UART_TX_A: JPA2.3
UART_TX_B: JPA2.1
VBLUE: C1.2 C2.2 C3.2 C4.2 C5.2 C6.2 JPA4.2 R2.2 U1.6 U1.19 U1.24
VBM: CM1.1 CN1.7 JP1.1 JP2.1 JP3.1 JPA1.2 MD1.5 RM1.2
VBUS: C28.2 U3.Y2
VCC: JPA1.1 JPA4.1
VIN: CN1.15
VNRF: C19.2 C27.2 C31.1 C32.1 U3.AD14 U3.AD23 U3.B1 U3.W1
pads on no net: C13.1 C26.1 C29.2 C30.2 CN1.1 CN1.17 CN1.18 CN1.19 CN1.20 CN1.21 CN1.22 CN1.23 CN1.24 CN1.25 CN1.27 CN1.47 CN1.68 CN1.69 CN1.70 CN1.72 CN1.73 CN1.74 CN1.75 CN1.76 CN1.77 CN1.78 CN1.79 CN1.80 CN1.82 JP1.6 JP2.6 JP3.5 JP3.6 L5.2 MD1.19 MD?.6 MD?.7 MD?.8 MD?.9 MD?.10 MD?.11 MD?.12 MD?.14 MD?.16 MD?.17 MD?.20 MD?.21 MD?.22 MD?.23 MD?.24 MD?.25 MD?.26 MD?.27 MD?.28 MD?.29 MD?.31 MD?.32 MD?.33 MD?.34 MD?.35 MD?.36 MD?.37 MD?.38 MD?.39 MD?.40 MD?.41 MD?.42 MD?.43 MD?.45 MD?.46 MD?.47 MD?.48 MD?.49 MD?.50 MD?.51 MD?.52 MD?.53 MD?.54 MD?.55 MD?.56 MD?.57 MD?.58 MD?.59 MD?.60 MD?.61 MD?.62 MD?.63 MD?.64 MD?.65 MD?.66 MD?.67 MD?.68 R2.1 U1.13 U1.14 U1.25 U1.26 U3. U3.A18 U3.A22 U3.AB2 U3.AC5 U3.AC15 U3.AC19 U3.AC21 U3.AD2 U3.AD4 U3.AD6 U3.B5 U3.B19 U3.C1 U3.D23 U3.E24 U3.F23 U3.N24 U3.T23 U3.V23

## Keep-outs
Keep-Out Layer:
  the board outline again, w0.508

## Silkscreen, mask and mechanical layers (free items; w line width, h text height)
Mechanical 1:
  lines w0.508: 2.54,26.67 55.372,26.67

## Text inside footprints (layer, text, board x,y; h text height)
JP5: Mechanical 14 "1" at 29.71,12.256 h1.5 r90
U1: Top Overlay "*" at 39.034,79.071 h1.27 r270; Mechanical 13 "*" at 38.653,77.572 h1.27 r270
X2: Mechanical 14 "1" at 43.923,62.494 h0.5; Mechanical 14 "2" at 45.173,62.494 h0.5; Mechanical 14 "3" at 45.173,63.469 h0.5; Mechanical 14 "4" at 43.898,63.469 h0.5
X3: Mechanical 14 "1" at 14.856,21.973 h0.5; Mechanical 14 "2" at 16.106,21.973 h0.5; Mechanical 14 "3" at 16.106,22.948 h0.5; Mechanical 14 "4" at 14.831,22.948 h0.5